# Altium PCB PCB1.PcbDoc (part 2 of 3)
Units mm, origin at the board's own origin, x right, y up, seen from the top; angles counter-clockwise.
Board outline 144.5 x 134 mm, 4 copper layers ([L1] Top, [L2] GND, [L3] POWER, [L4] BOTTOM), stack 1.584 mm thick; 275 components, 215 nets, 860 pads, 1046 vias.
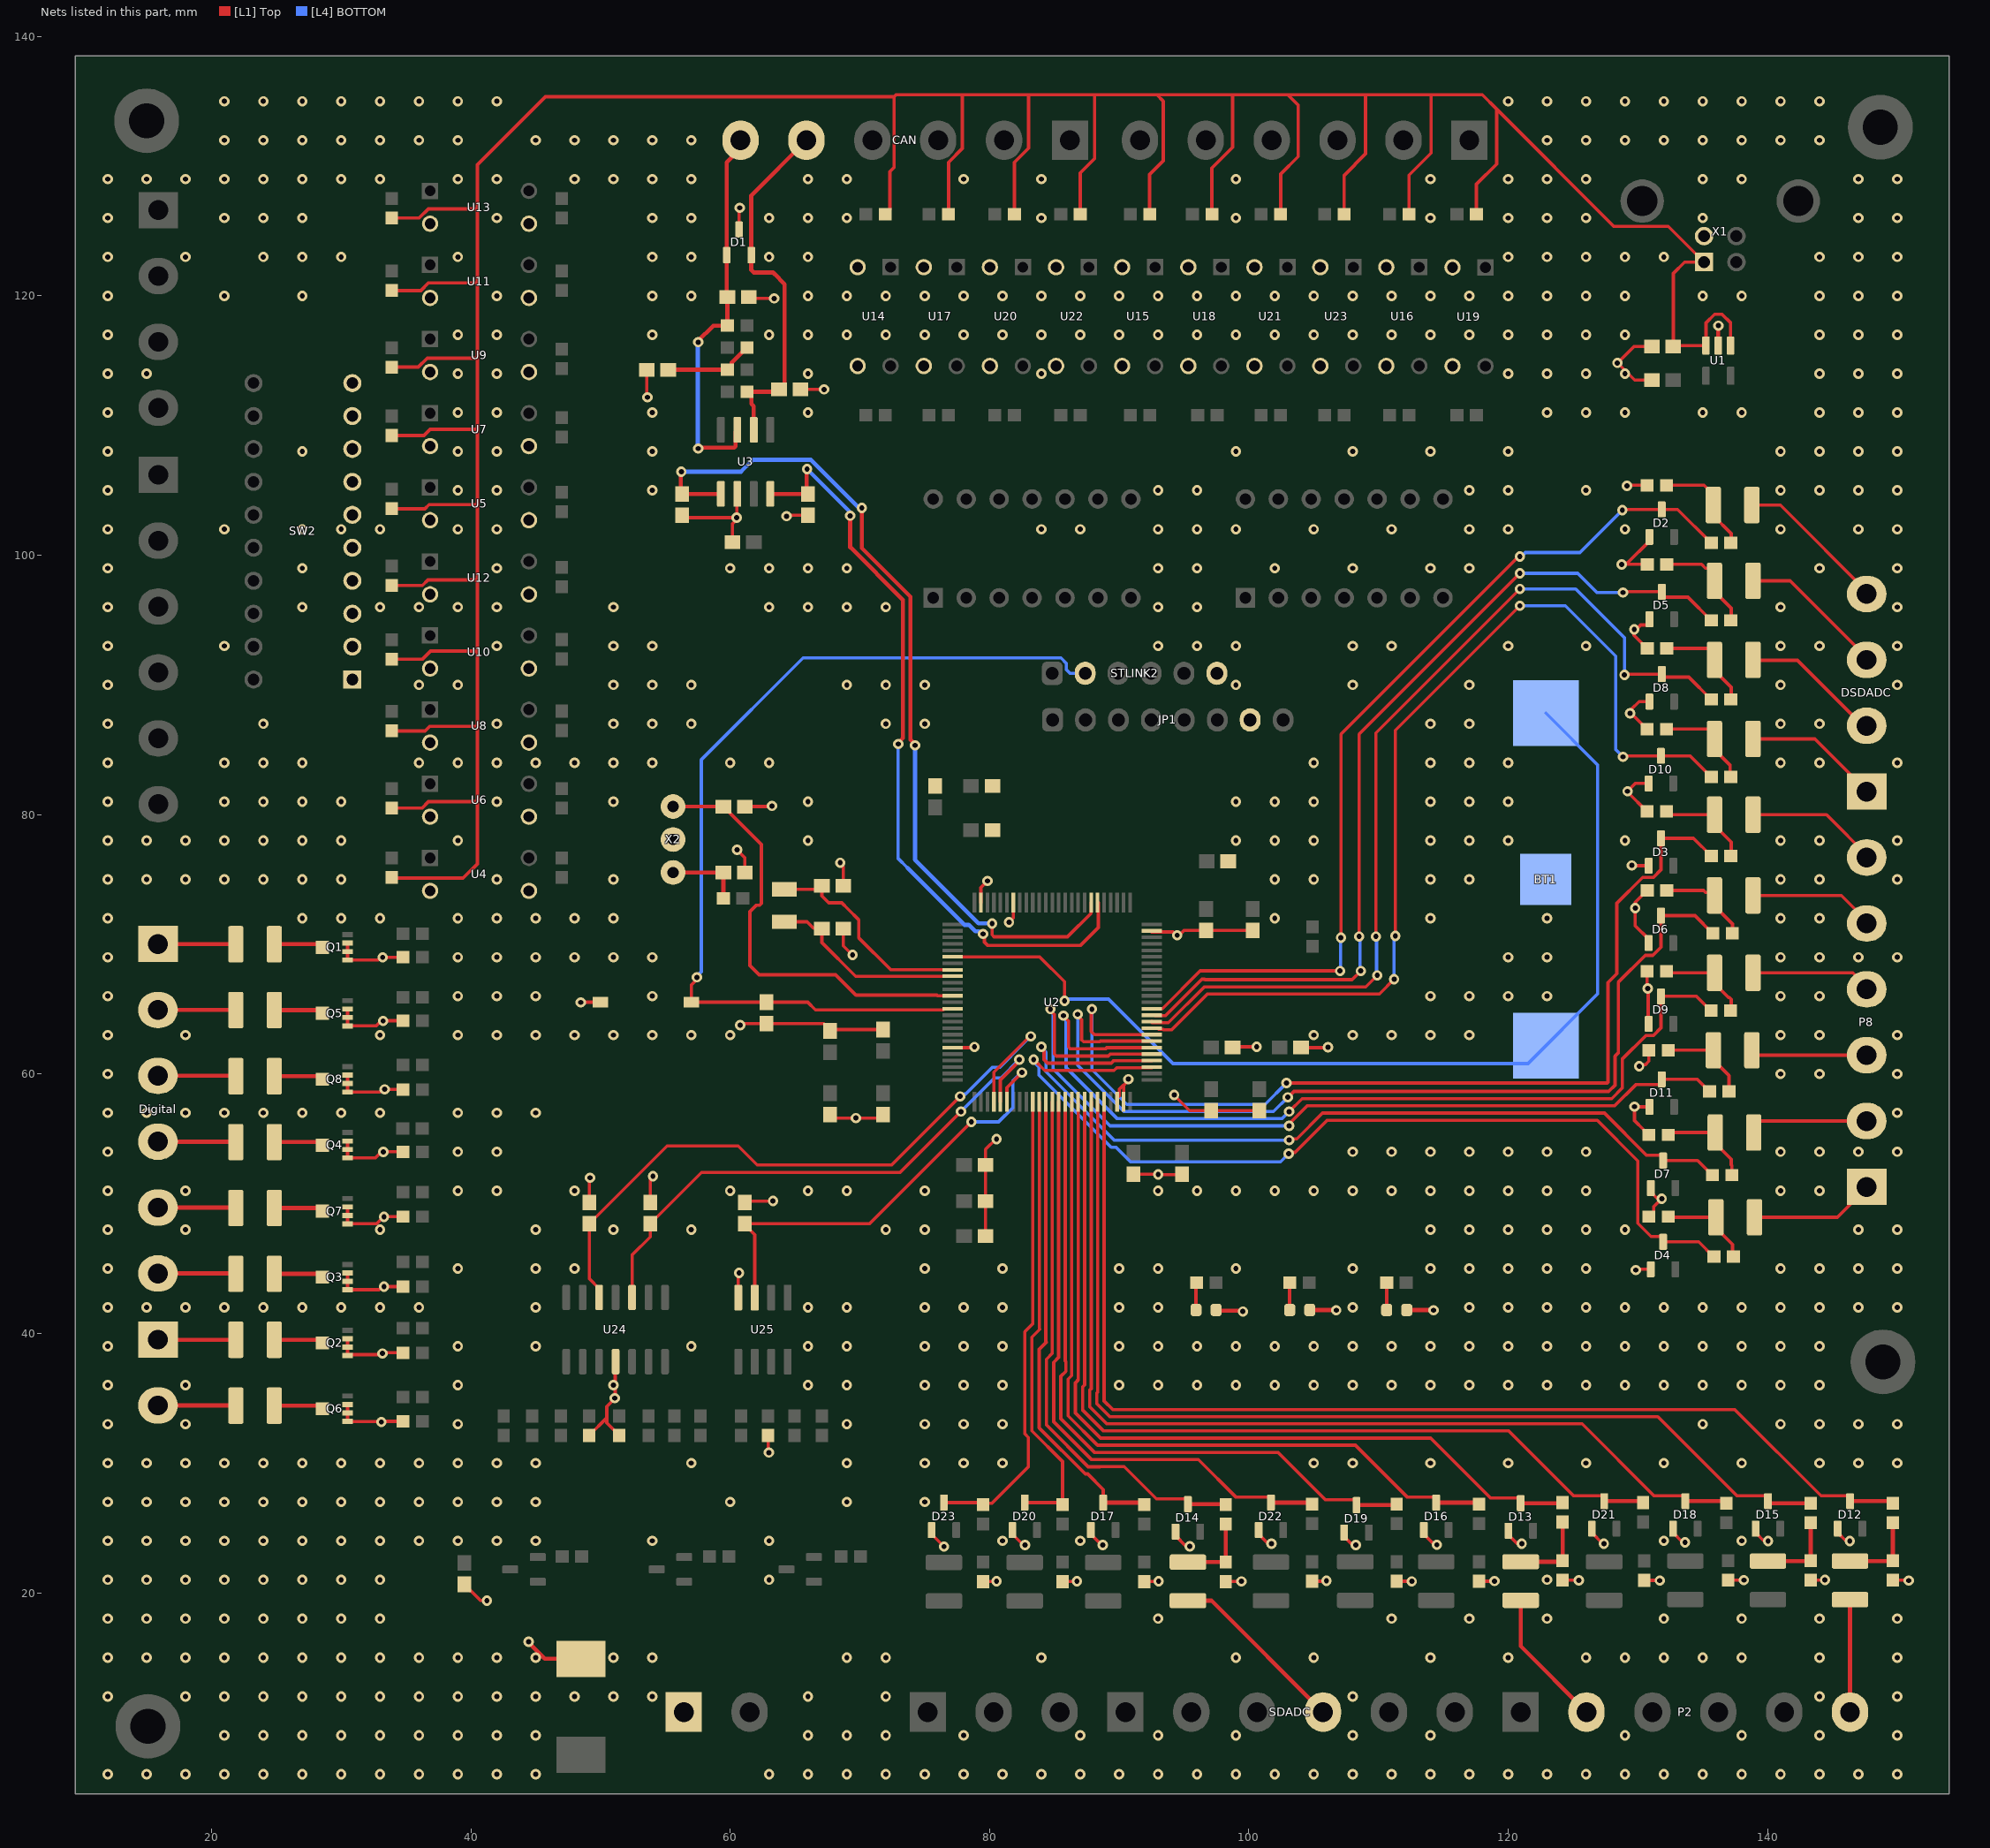
[diagram p4: the nets of this part, all layers, seen from the top]

## Via types
v1: diameter 0.8, hole 0.4, [L1] Top to [L4] BOTTOM, tented both sides, 816 vias
v2: diameter 0.8, hole 0.4, [L1] Top to [L4] BOTTOM, 223 vias
v3: diameter 1.27, hole 0.711, [L1] Top to [L4] BOTTOM, 5 vias
v4: diameter 0.8, hole 0.3, [L1] Top to [L4] BOTTOM, 2 vias

## Nets (pads, with @x,y where several pads share a name; then routed paths per layer and width w, separated by ;. In a path a pad name is that pad's centre, name@x,y a point inside that pad or via, vN(x,y) a via of type N, cw(c..) or ccw(c..) an arc to the next point about the centre after c; other vN are vias at no path point) (continued)
+5V: C11.2 R7.2 R9.2 R11.2 R13.2 R15.2 R17.2 R19.2 R21.2 R23.2 R25.2 R63.2 R65.2 R67.2 R69.2 R71.2 R73.2 R75.2 R77.2 R79.2 R81.2 U1.1 U1.3 X1.1 | length 337.8
  [L1] Top w0.26: R7.2@33.915,75.162 33.977,75.1 39.4,75.1 40.5,76.2 40.5,81 ; R11.2@33.915,80.503 36.239,80.503 36.736,81 40.5,81 ; R15.2@33.915,86.453 36.474,86.453 36.821,86.8 40.5,86.8 ; R19.2@33.915,91.986 36.292,91.986 36.906,92.6 40.5,92.6 ; R23.2@33.915,97.671 36.262,97.671 36.691,98.1 40.5,98.1 ; R9.2@33.915,103.583 36.459,103.583 36.776,103.9 40.5,103.9 ; R13.2@33.915,109.233 36.394,109.233 36.861,109.7 40.5,109.7 ; R17.2@33.915,114.5 35.946,114.5 36.646,115.2 40.5,115.2 ; R21.2@33.915,120.411 36.142,120.411 36.731,121 40.5,121 ; R25.2@33.915,126 36.016,126 36.716,126.7 40.5,126.7 ; R63.2@71.95,126.3 71.975,126.3 72.32,126.645 72.32,129.575 72.637,129.892 72.637,135.348 ; R69.2@76.835,126.3 76.835,130.296 77.9,131.361 77.9,135.5 ; R75.2@81.915,126.3 81.915,130.296 83,131.381 83,135.5 ; R79.2@86.995,126.3 86.995,129.478 88.1,130.583 88.1,135.5 ; R65.2@92.35,126.3 92.35,129.359 93.4,130.409 93.4,135 92.9,135.5 ; R71.2@97.15,126.3 97.15,129.85 98.75,131.45 98.75,135.5 ; R77.2@102.45,126.3 102.45,129.39 103.8,130.74 103.8,134.7 103,135.5 ; R81.2@107.35,126.3 107.35,129.3 109,130.95 109,135.5 ; R67.2@112.35,126.3 112.35,129.311 114.05,131.012 114.05,135.5 ; R73.2@117.55,126.3 117.55,128.613 119.1,130.163 119.1,134.4 ; U1.1@137.15,116.165 137.15,117.912 136.482,118.58 135.918,118.58 135.25,117.912 U1.3@135.25,116.165 132.791,116.165 C11.2@132.726,116.1 132.726,121.726 133.6,122.6 X1.1@135.1,122.6 132.343,125.357 128.143,125.357 119.1,134.4 ; 40.5,81 40.5,86.8 ; 40.5,86.8 40.5,92.6 ; 40.5,92.6 40.5,98.1 ; 40.5,98.1 40.5,103.9 ; 40.5,103.9 40.5,109.7 ; 40.5,109.7 40.5,115.2 ; 40.5,115.2 40.5,121 ; 40.5,121 40.5,126.7 ; 40.5,126.7 40.5,130.1 45.748,135.348 72.637,135.348 ; 72.637,135.348 72.789,135.5 77.9,135.5 ; 77.9,135.5 83,135.5 ; 83,135.5 88.1,135.5 ; 88.1,135.5 92.9,135.5 ; 92.9,135.5 98.75,135.5 ; 98.75,135.5 103,135.5 ; 103,135.5 109,135.5 ; 109,135.5 114.05,135.5 ; 114.05,135.5 118,135.5 119.1,134.4
GND: BT1.N C1.1 C2.1 C3.1 C4.1 C5.1 C6.1 C7.1 C8.1 C9.1 C10.1 C11.1 C12.2 C13.2 C14.1 C15.1 C16.1 C17.1 C18.1 C19.1 C20.1 C21.1 C22.1 C23.1 C24.2 C25.2 C26.2 C27.1 C28.1 C29.2 C30.1 C31.1 C32.1 C33.2 C34.2 C35.2 C36.2 D1.3 D2.1 D3.1 D4.1 D5.1 D6.1 D7.1 D8.1 D9.1 D10.1 D11.1 D12.1 D13.1 D14.1 D15.1 D16.1 D17.1 D18.1 D19.1 D20.1 D21.1 D22.1 D23.1 D24.A D25.1 D26.1 D27.1 JP1.7 PWR.1 Q1.1 Q1.2 Q1.3 Q2.1 Q2.2 Q2.3 Q3.1 Q3.2 Q3.3 Q4.1 Q4.2 Q4.3 Q5.1 Q5.2 Q5.3 Q6.1 Q6.2 Q6.3 Q7.1 Q7.2 Q7.3 Q8.1 Q8.2 Q8.3 R30.1 R31.1 R32.1 R36.1 R37.1 R38.1 R41.1 R42.1 R46.1 R47.1 R48.1 R52.1 R53.1 R54.1 R57.1 R58.1 R61.1 R62.1 R86.1 R87.1 R88.1 R92.1 R93.1 R94.1 R98.1 R99.1 R100.1 R104.1 R105.1 R106.1 R111.1 R112.1 R119.1 STLINK2.6 SW1.1 SW2.1 SW2.2 SW2.3 SW2.4 SW2.5 SW2.6 SW2.7 SW2.8 SW2.9 SW2.10 U1.2 U2.20 U2.48 U2.49 U2.74 U2.94 U2.99 U3.2 U4.2 U4.3 U5.2 U5.3 U6.2 U6.3 U7.2 U7.3 U8.2 U8.3 U9.2 U9.3 U10.2 U10.3 U11.2 U11.3 U12.2 U12.3 U13.2 U13.3 U14.2 U14.3 U15.2 U15.3 U16.2 U16.3 U17.2 U17.3 U18.2 U18.3 U19.2 U19.3 U20.2 U20.3 U21.2 U21.3 U22.2 U22.3 U23.2 U23.3 U24.11 U25.4 X1.4 X2.3 | length 237.2
  [L1] Top w0.25: Q6.3@30.489,34.519 Q6.2@30.489,33.869 Q6.1@30.489,33.219 30.516,33.192 33.071,33.192 v2(33.098,33.165) ; Q2.3@30.489,39.587 Q2.2@30.489,38.937 Q2.1@30.489,38.287 30.564,38.362 33.1,38.362 v2(33.187,38.448) ; Q3.3@30.489,44.667 Q3.2@30.489,44.017 Q3.1@30.489,43.367 32.925,43.367 33.156,43.599 v2(33.305,43.599) ; Q7.3@30.489,49.747 Q7.2@30.489,49.097 Q7.1@30.489,48.447 32.748,48.447 33.287,48.986 v2(33.305,48.986) ; Q4.3@30.489,54.827 Q4.2@30.489,54.177 Q4.1@30.489,53.527 32.636,53.527 33.097,53.988 v2(33.246,53.988) ; Q8.3@30.489,59.907 Q8.2@30.489,59.257 Q8.1@30.489,58.607 32.995,58.607 33.201,58.813 v2(33.35,58.813) ; Q5.3@30.489,65.007 Q5.2@30.489,64.357 Q5.1@30.489,63.707 32.714,63.707 33.09,64.083 v2(33.239,64.083) ; Q1.3@30.489,70.087 Q1.2@30.489,69.437 Q1.1@30.489,68.787 32.844,68.787 33.053,68.995 v2(33.202,68.995) ; v2@33.1,33.2 33.119,33.219 R38.1@34.76,33.219 ; v2@33.187,38.5 R31.1@34.76,38.5 ; v2@33.2,54 R36.1@34.76,54 ; v2@33.2,69 R30.1@34.76,69 ; v2@33.239,64.1 R37.1@34.76,64.1 ; v2@33.3,43.6 R32.1@34.76,43.6 ; v2@33.3,49 R41.1@34.76,49 ; v2@33.3,58.8 R42.1@34.76,58.8 ; C33.2@39.5,20.65 39.5,20.576 39.904,20.172 39.978,20.172 40.75,19.4 v2@41.2,19.4 ; v2@48.4,65.5 48.432,65.532 SW1.1@50,65.532 ; R119.1@49.135,32.119 49.135,32.144 50.48,33.489 ; C34.2@49.135,50.099 49.135,51.935 v2@49.2,52 ; U24.11@51.165,37.819 51.132,37.787 51.132,35.032 v2(51.1,35) 51.1,34.967 50.48,34.347 50.48,33.489 ; R111.1@51.435,32.119 51.435,32.144 50.48,33.099 50.48,33.489 ; C28.1@53.574,114.3 53.574,112.226 v2@53.6,112.2 ; C36.2@53.835,50.099 53.835,51.935 v2@54,52.1 ; C31.1@56.3,103.075 56.475,102.9 v2(60.5,102.9) ; C30.1@60.17,101 60.17,102.421 60.5,102.751 v2(60.5,102.9) ; v2@60.5,77.3 61.126,76.674 C24.2@61.126,75.538 ; U3.2@60.552,104.727 60.526,104.701 60.526,102.926 v2(60.5,102.9) ; v2@60.6,44.7 60.625,44.675 U25.4@60.625,42.759 ; D1.3@60.679,125.104 60.679,126.779 v2@60.7,126.8 ; v2@60.7,63.8 60.78,63.88 C25.2@62.8,63.88 67.22,63.88 67.7,63.4 C17.1@67.7,63.326 67.8,63.426 C16.1@71.8,63.426 ; C35.2@61.12,50.099 61.221,50.2 v2@63.3,50.2 ; C12.2@61.126,80.618 63.118,80.618 v2@63.2,80.7 ; C27.1@61.441,119.897 61.538,119.8 v2(63.4,119.8) ; v2@62.9,30.8 62.93,30.83 R112.1@62.93,32.119 ; v2@64.3,103 64.375,103.075 C29.2@66,103.075 ; C32.1@65.426,112.8 v2@67.2,112.8 ; C21.1@67.7,56.874 67.974,56.6 v2(69.7,56.6) 71.526,56.6 C20.1@71.8,56.874 ; v2@68.4,76.3 68.726,75.974 C13.2@68.726,74.5 ; C26.2@68.726,71.2 68.726,69.874 v2@69.4,69.2 ; D23.1@75.534,24.83 75.534,24.515 76.449,23.6 v2@76.5,23.6 ; U2.20@77.156,62.032 78.732,62.032 v2@78.8,62.1 ; U2.99@79.336,73.212 79.336,74.367 79.8,74.831 v2@79.8,74.9 ; R106.1@79.488,20.858 80.458,20.858 v2@80.5,20.9 ; C6.1@79.688,47.5 C4.1@79.688,50.2 C5.1@79.688,53 79.688,54.188 v2@80.5,55 ; v2(81.5,71.7) 81.836,72.036 U2.94@81.836,73.212 ; D20.1@81.765,24.83 81.765,24.515 82.58,23.7 v2@82.7,23.7 ; R100.1@85.636,20.858 86.458,20.858 v2@86.5,20.9 ; D17.1@87.815,24.83 87.815,24.515 88.63,23.7 v2@88.7,23.7 ; U2.48@89.836,57.852 89.836,58.136 90,58.3 90,58.8 90.326,59.126 90.356,59.126 ; U2.49@90.336,57.852 90.356,57.872 90.356,59.126 ; v2(90.7,59.6) 90.7,59.47 90.356,59.126 ; C18.1@91.1,52.274 v2@92.974,52.274 ; R94.1@91.94,20.858 92.958,20.858 v2@93,20.9 ; U2.74@92.516,71.032 92.516,70.947 94.153,70.947 v2@94.4,70.7 ; v2(93.003,52.245) 94.807,52.245 C19.1@94.836,52.274 ; v2@94.2,58.4 95.426,57.174 C22.1@97.1,57.174 C23.1@100.8,57.174 ; D14.1@94.346,24.71 94.346,24.395 95.141,23.6 v2@95.4,23.6 ; v2(94.472,70.694) 94.621,70.694 95.001,71.074 C9.1@96.7,71.074 C8.1@100.3,71.074 ; R88.1@98.217,20.858 99.358,20.858 v2@99.4,20.9 ; C14.1@98.752,62.032 98.82,62.1 v2(100.6,62.1) ; D22.1@100.75,24.83 100.75,24.515 101.465,23.8 v2@101.7,23.8 ; C15.1@104.026,62.032 106.032,62.032 v2@106.1,62.1 ; R105.1@104.875,20.885 105.885,20.885 v2@106,21 ; D19.1@107.35,24.64 107.35,24.325 107.975,23.7 v2@108.2,23.7 ; R99.1@111.398,20.885 112.485,20.885 v2@112.5,20.9 ; D16.1@113.496,24.83 113.496,24.515 114.206,23.805 114.395,23.805 v2(114.5,23.7) ; R93.1@117.736,20.885 118.885,20.885 v2@118.9,20.9 ; D13.1@120.01,24.779 120.01,24.464 120.674,23.8 v2@121,23.8 ; R87.1@124.2,20.973 125.373,20.973 v2@125.4,21 ; D21.1@126.45,24.94 126.45,24.625 127.275,23.8 v2@127.4,23.8 ; v2@128.4,114.8 129.7,116.1 C11.1@131.074,116.1 ; v2(128.419,114.827) 129.746,113.5 C10.1@131.074,113.5 ; v2@128.7,99.3 v2@128.705,99.295 ; v2(128.744,99.278) 128.849,99.384 129.182,99.384 130.893,101.095 D2.1@130.893,101.41 ; v2@129.1,105.4 129.109,105.391 R46.1@130.712,105.391 ; 129.182,99.295 R52.1@130.724,99.295 ; v2@129.5,76.1 129.546,76.054 D3.1@130.832,76.054 ; v2@129.7,94.3 129.7,93.817 130.699,92.818 R57.1@130.724,92.818 ; v2(129.721,94.277) 129.87,94.277 130.218,94.624 130.718,94.624 130.893,94.799 D5.1@130.893,95.06 ; v2@129.732,57.468 D11.1@130.893,57.468 ; v2(129.739,57.483) 129.739,56.411 130.475,55.675 130.475,55.65 130.825,55.3 R54.1@130.85,55.3 ; v2(129.795,72.796) 129.795,71.432 130.827,70.4 D6.1@130.827,70.085 ; v2@129.8,44.9 129.84,44.94 D4.1@130.993,44.94 ; v2@129.8,72.8 129.8,73.25 130.699,74.149 R53.1@130.724,74.149 ; v2(130.1,60.6) 130.205,60.705 130.564,60.705 130.839,60.98 R62.1@130.839,61.83 ; R104.1@130.5,20.95 131.65,20.95 v2@131.7,20.9 ; v2@130.712,66.612 R58.1@130.712,67.926 ; R47.1@130.712,80.245 130.687,80.245 129.2,81.732 v2(129.2,81.8) 129.804,82.404 D10.1@130.827,82.404 ; R61.1@130.712,86.595 130.687,86.595 129.482,87.8 v2(129.4,87.8) 129.505,87.905 129.505,88.125 130.09,88.71 D8.1@130.893,88.71 ; v2(130.751,66.595) 130.792,66.555 130.792,63.902 D9.1@130.832,63.862 ; R48.1@130.85,49 130.875,49 131.225,49.35 131.225,49.769 v2(131.839,50.383) ; D7.1@130.993,51.205 130.993,50.89 131.483,50.4 v2@131.8,50.4 ; D18.1@132.71,24.94 132.71,24.625 133.435,23.9 v2@133.6,23.9 ; R98.1@136.962,20.973 v2(138.173,20.973) ; D15.1@139.079,24.94 139.079,24.625 139.704,24 v2@140,24 ; R92.1@143.331,20.966 144.366,20.966 v2@144.4,21 ; D12.1@145.41,24.94 145.41,24.625 146.035,24 v2@146.3,24 ; R86.1@149.662,20.966 150.734,20.966 v2@150.8,20.9
  [L1] Top w0.32: v2@44.4,16.2 45.7,14.9 D24.A@48.5,14.9 ; D25.1@97.475,41.8 97.525,41.75 99.45,41.75 v2@99.5,41.7 ; D26.1@104.698,41.8 v2@106.7,41.8 ; D27.1@112.175,41.8 v2@114.2,41.8 ; U1.2@136.2,116.165 v2(136.2,117.7)
  other v1: 12,6 15,6 18,6 21,6 24,6 27,6 30,6 33,6 36,6 39,6 42,6 45,6 63,6 66,6 69,6 72,6 75,6 78,6 81,6 84,6 87,6 90,6 93,6 96,6 99,6 102,6 105,6 108,6 111,6 114,6 117,6 120,6 123,6 126,6 129,6 132,6 135,6 138,6 141,6 144,6 147,6 150,6 21,9 24,9 27,9 30,9 33,9 36,9 39,9 42,9 45,9 66,9 69,9 72,9 78,9 87,9 93,9 99,9 108,9 114,9 129,9 138,9 144,9 150,9 12,12 18,12 21,12 24,12 27,12 30,12 33,12 36,12 39,12 42,12 45,12 48,12 51,12 54,12 66,12 72,12 108,12 144,12 150,12 12,15 15,15 18,15 21,15 24,15 27,15 30,15 33,15 36,15 39,15 42,15 45,15 51,15 54,15 69,15 72,15 84,15 99,15 105,15 114,15 120,15 126,15 129,15 132,15 135,15 138,15 144,15 150,15 12,18 15,18 18,18 21,18 24,18 27,18 30,18 33,18 93,18 111,18 117,18 123,18 132,18 138,18 144,18 150,18 12,21 15,21 18,21 21,21 24,21 27,21 30,21 33,21 63,21 123,21 12,24 15,24 18,24 21,24 24,24 27,24 30,24 33,24 36,24 39,24 42,24 45,24 54,24 63,24 81,24 87,24 132,24 138,24 12,27 15,27 18,27 21,27 24,27 27,27 30,27 33,27 36,27 39,27 42,27 45,27 60,27 69,27 75,27 12,30 15,30 18,30 21,30 24,30 27,30 30,30 33,30 36,30 39,30 42,30 45,30 57,30 69,30 75,30 78,30 81,30 105,30 108,30 114,30 120,30 126,30 132,30 138,30 144,30 147,30 150,30 12,33 18,33 39,33 69,33 75,33 78,33 81,33 135,33 141,33 144,33 147,33 150,33 12,36 18,36 39,36 51,36 66,36 69,36 75,36 78,36 81,36 90,36 93,36 96,36 99,36 102,36 105,36 108,36 111,36 114,36 117,36 120,36 123,36 126,36 129,36 132,36 135,36 138,36 141,36 144,36 12,39 39,39 45,39 57,39 66,39 69,39 75,39 78,39 81,39 90,39 93,39 96,39 99,39 102,39 105,39 108,39 111,39 114,39 117,39 120,39 123,39 126,39 129,39 132,39 135,39 138,39 141,39 144,39 12,42 15,42 18,42 21,42 24,42 27,42 30,42 33,42 36,42 45,42 66,42 69,42 75,42 78,42 81,42 90,42 93,42 108,42 117,42 120,42 123,42 126,42 129,42 132,42 135,42 138,42 141,42 144,42 147,42 150,42 12,45 39,45 45,45 48,45 75,45 81,45 90,45 93,45 99,45 108,45 114,45 117,45 120,45 123,45 126,45 141,45 144,45 147,45 150,45 12,48 18,48 33,48 45,48 51,48 57,48 72,48 75,48 114,48 117,48 120,48 123,48 126,48 129,48 147,48 150,48 12,51 18,51 39,51 42,51 48,51 60,51 66,51 69,51 75,51 93,51 96,51 99,51 102,51 105,51 108,51 111,51 114,51 117,51 120,51 123,51 126,51 141,51 144,51 12,54 39,54 42,54 108,54 111,54 114,54 117,54 120,54 123,54 126,54 141,54 144,54 147,54 150,54 12,57 15,57 18,57 21,57 24,57 27,57 30,57 33,57 39,57 42,57 45,57 150,57 12,60 141,60 144,60 150,60 12,63 18,63 33,63 39,63 42,63 45,63 48,63 51,63 54,63 57,63 60,63 105,63 108,63 111,63 114,63 117,63 141,63 144,63 150,63 12,66 39,66 42,66 45,66 54,66 114,66 117,66 120,66 123,66 141,66 144,66 12,69 39,69 42,69 45,69 48,69 51,69 54,69 120,69 123,69 141,69 144,69 147,69 150,69 12,72 27,72 30,72 33,72 39,72 42,72 45,72 48,72 51,72 102,72 114,72 123,72 141,72 144,72 12,75 15,75 18,75 21,75 24,75 27,75 30,75 42,75 51,75 102,75 105,75 114,75 117,75 141,75 144,75 150,75 12,78 15,78 18,78 21,78 24,78 27,78 30,78 39,78 66,78 99,78 102,78 105,78 114,78 117,78 120,78 129,78 141,78 144,78 150,78 12,81 21,81 24,81 27,81 30,81 42,81 51,81 66,81 99,81 102,81 105,81 114,81 117,81 120,81 12,84 21,84 24,84 27,84 36,84 39,84 42,84 45,84 48,84 51,84 54,84 60,84 63,84 105,84 114,84 117,84 120,84 141,84 144,84 150,84 12,87 24,87 42,87 51,87 54,87 57,87 72,87 75,87 114,87 117,87 141,87 144,87 12,90 36,90 39,90 51,90 54,90 57,90 69,90 72,90 75,90 99,90 108,90 117,90 141,90 150,90 12,93 21,93 42,93 51,93 54,93 93,93 96,93 99,93 108,93 111,93 120,93 126,93 141,93 144,93 150,93 12,96 27,96 33,96 36,96 39,96 42,96 51,96 63,96 66,96 69,96 72,96 93,96 96,96 141,96 150,96 12,99 27,99 42,99 60,99 63,99 66,99 69,99 93,99 96,99 102,99 108,99 114,99 117,99 144,99 150,99 12,102 21,102 27,102 30,102 33,102 39,102 42,102 84,102 87,102 93,102 96,102 99,102 105,102 111,102 117,102 120,102 129,102 141,102 147,102 150,102 12,105 39,105 42,105 54,105 93,105 96,105 117,105 120,105 126,105 141,105 144,105 147,105 150,105 12,108 27,108 39,108 42,108 54,108 99,108 108,108 114,108 120,108 141,108 144,108 147,108 150,108 12,111 39,111 42,111 54,111 66,111 123,111 126,111 129,111 135,111 138,111 144,111 147,111 150,111 12,114 15,114 39,114 42,114 66,114 84,114 120,114 123,114 126,114 129,114 144,114 147,114 150,114 12,117 39,117 42,117 54,117 63,117 66,117 69,117 72,117 75,117 78,117 81,117 84,117 87,117 90,117 93,117 96,117 99,117 102,117 105,117 108,117 111,117 114,117 117,117 120,117 123,117 126,117 129,117 144,117 147,117 150,117 12,120 21,120 27,120 42,120 54,120 57,120 66,120 69,120 72,120 75,120 78,120 81,120 84,120 87,120 90,120 93,120 96,120 99,120 102,120 105,120 108,120 111,120 114,120 117,120 120,120 123,120 126,120 129,120 135,120 138,120 144,120 147,120 150,120 12,123 18,123 24,123 27,123 30,123 39,123 54,123 57,123 63,123 66,123 120,123 123,123 126,123 129,123 132,123 144,123 147,123 150,123 12,126 21,126 24,126 27,126 42,126 54,126 57,126 63,126 66,126 69,126 84,126 99,126 114,126 120,126 123,126 126,126 135,126 147,126 150,126 12,129 15,129 18,129 21,129 24,129 27,129 30,129 33,129 39,129 42,129 48,129 51,129 54,129 57,129 66,129 69,129 78,129 84,129 99,129 114,129 120,129 123,129 126,129 135,129 138,129 147,129 150,129 21,132 24,132 27,132 30,132 33,132 36,132 39,132 45,132 48,132 51,132 54,132 57,132 123,132 126,132 129,132 132,132 135,132 138,132 141,132 144,132 21,135 24,135 27,135 30,135 33,135 36,135 39,135 42,135 120,135 123,135 126,135 129,135 132,135 135,135 138,135 141,135 144,135
  other v2: 44.463,16.227 41.239,19.383 80.539,20.883 86.739,20.883 93.039,20.883 99.423,20.875 112.559,20.875 118.94,20.896 105.982,20.926 131.689,20.933 150.882,20.933 125.438,20.96 144.424,20.982 76.492,23.559 95.439,23.583 82.739,23.683 88.739,23.683 108.239,23.683 101.739,23.783 121.039,23.783 127.377,23.783 133.639,23.883 140.039,23.983 146.339,23.983 62.98,30.809 99.539,41.683 106.739,41.783 114.239,41.783 60.687,44.659 129.839,44.883 63.302,50.214 49.192,51.994 54.048,52.12 80.539,54.983 94.239,58.383 106.109,62.057 78.839,62.083 60.77,63.757 48.471,65.515 69.439,69.183 79.839,74.883 129.539,76.083 68.488,76.285 60.539,77.283 63.223,80.666 64.34,103.009 129.153,105.351 53.622,112.179 67.239,112.783 60.739,126.783
NetBT1_P1: BT1.P1 BT1.P2 U2.6 | length 79.8
  [L1] Top w0.25: U2.6@77.156,69.032 83.868,69.032 85.783,67.117 v2(85.783,65.634)
  [L4] BOTTOM w0.25: v2@85.7,65.6 85.875,65.775 89.17,65.775 94.145,60.8 121.525,60.8 126.9,66.175 126.9,83.825 BT1.P1@122.9,87.825
NetC12_1: C12.1 U2.12 X2.1 | length 34.5
  [L1] Top w0.25: X2.1@55.6,80.618 C12.1@59.474,80.618 59.548,80.618 59.952,80.214 59.952,80.14 62.4,77.692 62.4,73.146 62.254,73 62,73 61.524,72.524 61.524,68.354 62.228,67.65 68.132,67.65 69.7,66.082 75.933,66.082 75.983,66.032 U2.12@77.156,66.032
NetC13_1: C13.1 U2.8 Y1.2 | length 17
  [L1] Top w0.25: Y1.2@64.167,74.232 C13.1@67.142,74.232 ; C13.1@67.074,74.5 67.074,73.726 67.6,73.2 68.6,73.2 69.1,72.7 69.904,71.896 69.904,70.515 72.387,68.032 U2.8@77.156,68.032
NetC24_1: C24.1 R2.2 X2.2 | length 5.9
  [L1] Top w0.32: X2.2@55.6,75.538 C24.1@59.474,75.538 R2.2@59.474,73.538
NetC25_1: C25.1 STLINK2.2 SW1.2 U2.14 | length 73.1
  [L1] Top w0.25: v2(57.436,67.452) 57.436,67.303 57,66.867 SW1.2@57,65.532 C25.1@62.8,65.532 65.979,65.532 66.579,64.932 76.262,64.932 76.262,64.947 76.431,64.947 76.516,65.032 U2.14@77.156,65.032
  [L4] BOTTOM w0.25: v2@57.4,67.5 57.78,67.88 57.78,84.226 65.628,92.075 85.516,92.075 85.911,91.68 85.911,91.19 86.201,90.9 STLINK2.2@87.376,90.9
NetC26_1: C26.1 U2.9 Y1.1 | length 15.3
  [L1] Top w0.25: Y1.1@64.167,71.732 65.932,71.732 66.432,71.232 C26.1@67.074,71.232 ; C26.1@67.074,71.2 67.074,70.126 69.668,67.532 U2.9@77.156,67.532
NetC27_2: C27.2 CAN.6 D1.1 R3.2 U3.7 | length 30
  [L1] Top w0.32: v2@57.5,108.3 60.313,108.3 60.412,108.399 60.412,109.527 U3.7@60.552,109.667 ; v2@57.5,116.5 58.7,117.7 R3.2@59.789,117.7 C27.2@59.789,119.897 59.729,119.957 D1.1@59.729,123.144 59.729,130.29 60.8,131.361 CAN.6@60.8,132
  [L4] BOTTOM w0.32: v2@57.5,108.3 v2@57.5,116.5
  other v2: 57.527,108.225 57.527,116.425
NetC28_2: C28.2 R4.1 R5.2 | length 7.6
  [L1] Top w0.32: C28.2@55.226,114.3 R5.2@60.089,114.3 ; C28.2@55.226,114.6 C28.2@55.526,114.3 ; R5.2@59.814,114.3 60.129,114.615 60.129,114.865 61.264,116 R4.1@61.289,116
NetC29_1: C29.1 U2.81 U3.4 | length 59
  [L1] Top w0.25: v2(79.5,70.8) 79.605,70.695 79.605,70.168 79.873,69.9 87,69.9 88.386,71.286 88.386,73.212 U2.81@88.336,73.212
  [L1] Top w0.32: U3.4@63.092,104.727 C29.1@66,104.727 ; v2@65.9,106.7 65.9,104.827 C29.1@66,104.727 ; v2(69.255,103.043) 69.255,100.617 73.315,96.558 73.315,85.9 72.915,85.5 v2@72.9,85.5
  [L4] BOTTOM w0.25: v2(72.955,85.443) 72.955,76.601 73.654,75.902
  [L4] BOTTOM w0.32: v2(65.932,106.641) v2@69.337,103.237 ; 73.654,75.902 78.056,71.5 78.398,71.5 78.903,70.995 79.175,70.995 79.37,70.8 v2(79.5,70.8)
NetC31_2: C31.2 U2.82 U3.1 | length 67.3
  [L1] Top w0.25: v2(80.2,71.6) 80.2,70.721 80.346,70.575 86.008,70.575 87.821,72.388 87.821,72.557 87.836,72.572 U2.82@87.836,73.212
  [L1] Top w0.32: v2@56.2,106.5 56.2,104.827 C31.2@56.3,104.727 U3.1@59.282,104.727 ; v2(70.155,103.643) 70.155,100.545 73.9,96.8 73.9,85.771 74.2,85.471 v2@74.2,85.4
  [L4] BOTTOM w0.32: v2(56.232,106.441) 60.839,106.441 61.749,107.351 66.226,107.351 v2@69.939,103.639 ; v2(74.255,85.343) 74.255,76.52 79.16,71.615 80.185,71.615 v2(80.2,71.6)
NetC32_2: C32.2 CAN.5 D1.2 R6.1 U3.6 | length 28.8
  [L1] Top w0.32: U3.6@61.822,109.667 61.8,109.689 61.8,111.5 61.629,111.671 61.629,112.285 61.314,112.6 R6.1@61.289,112.6 63.574,112.6 C32.2@63.774,112.8 63.831,112.8 64.2,113.169 64.2,120.9 63.4,121.7 63.3,121.8 61.816,121.8 61.629,121.987 D1.2@61.629,123.144 61.629,127.749 CAN.5@65.88,132
NetC34_1: C34.1 U2.29 U24.5 | length 53.6
  [L1] Top w0.25: U24.5@49.895,42.769 49.895,43.454 49.135,44.214 C34.1@49.135,48.447 49.135,48.521 49.504,48.89 49.578,48.89 55.138,54.45 60.616,54.45 62.076,52.99 72.452,52.99 v2(77.731,58.269) ; U2.29@80.336,57.852 80.336,60.136 83.1,62.9 v2(83.175,62.9)
  [L4] BOTTOM w0.25: v2(77.731,58.269) 77.88,58.269 78.058,58.448 78.148,58.448 80.212,60.511 80.811,60.511 81.625,61.325 81.625,61.38 83.145,62.9 v2(83.175,62.9)
NetC35_1: C35.1 U2.31 U25.3 | length 36.1
  [L1] Top w0.25: C35.1@61.12,48.373 61.895,47.598 U25.3@61.895,42.759 ; C35.1@61.12,48.447 70.747,48.447 v2(78.6,56.3) ; U2.31@81.336,57.852 81.336,58.936 82.5,60.1 v2(82.5,60.109)
  [L4] BOTTOM w0.25: v2(78.6,56.3) 80.7,56.3 81.8,57.4 81.8,59.471 82.438,60.109 v2(82.5,60.109)
NetC36_1: C36.1 U2.30 U24.3 | length 43.9
  [L1] Top w0.25: U24.3@52.435,42.769 52.435,46.035 53.835,47.435 C36.1@53.835,48.447 53.835,48.521 54.204,48.89 54.278,48.89 57.793,52.405 73.105,52.405 v2(77.8,57.1) ; U2.30@80.836,57.852 80.836,59.536 82.3,61 v2(82.3,61.1)
  [L4] BOTTOM w0.25: v2(77.8,57.1) 80.395,59.695 80.895,59.695 v2(82.3,61.1)
NetD2_3: D2.3 R43.2 U2.62 | length 70.8
  [L1] Top w0.25: U2.62@92.516,65.032 92.531,65.047 93.34,65.047 96.25,67.957 107.016,67.957 v2(107.032,67.941) ; v2(107.1,70.5) 107.1,86.2 120.8,99.9 v2(120.9,99.9) ; v2@128.77,103.53 D2.3@131.843,103.53 133.056,103.53 135.64,100.946 R43.2@135.665,100.946
  [L4] BOTTOM w0.25: v2(107.032,67.941) 107.066,67.975 107.066,70.466 v2(107.1,70.5) ; v2(120.9,99.9) 121.021,99.9 121.321,100.2 125.531,100.2 v2(128.802,103.471)
NetD3_3: D3.3 R44.2 U2.58 | length 78.2
  [L1] Top w0.25: v2(87.9,65) 87.85,64.95 87.85,63.274 88.092,63.032 U2.58@92.516,63.032 ; v2(102.9,59.3) 127.625,59.3 127.69,59.366 127.69,67.046 128.372,67.728 128.372,73.161 130.375,75.164 131.202,75.164 131.782,75.744 D3.3@131.782,78.174 134.282,78.174 135.64,76.816 R44.2@135.665,76.816
  [L4] BOTTOM w0.25: v2(87.9,65) 87.9,60.345 90.595,57.65 101.25,57.65 v2(102.9,59.3)
NetD4_3: D4.3 R45.2 U2.53 | length 74.4
  [L1] Top w0.25: v2(83.4,61.1) 83.422,61.1 84.247,60.275 89.608,60.275 89.815,60.482 92.516,60.482 U2.53@92.516,60.532 ; v2(103.068,53.855) 103.173,53.96 103.56,53.96 106.032,56.432 126.868,56.432 130,53.3 130,48.486 131.011,47.475 131.768,47.475 131.943,47.3 D4.3@131.943,47.06 134.685,47.06 135.84,45.905 R45.2@135.865,45.905
  [L4] BOTTOM w0.25: v2(83.4,61.1) 83.4,60.951 83.8,60.551 83.8,59.937 89.387,54.35 89.75,54.35 90.875,53.225 102.438,53.225 v2(103.068,53.855)
NetD5_3: D5.3 R49.2 U2.61 | length 69.6
  [L1] Top w0.25: U2.61@92.759,64.497 93.568,64.497 96.374,67.304 96.581,67.304 96.619,67.266 107.957,67.266 v2(108.632,67.941) ; v2(108.5,70.6) 108.5,86.2 v2(120.9,98.6) ; v2@128.82,97.18 D5.3@131.843,97.18 131.843,96.94 132.018,96.765 133.852,96.765 135.64,94.977 R49.2@135.665,94.977
  [L4] BOTTOM w0.25: v2(108.5,70.6) 108.566,70.534 108.566,68.034 v2@108.6,68 ; v2(120.9,98.6) 125.368,98.6 126.846,97.121 v2(128.852,97.121)
NetD6_3: D6.3 R50.2 U2.57 | length 74.7
  [L1] Top w0.25: v2(86.8,64.6) 86.8,64.479 87.1,64.179 87.1,62.628 87.246,62.482 88.5,62.482 88.55,62.532 U2.57@92.516,62.532 ; v2(103,58.2) 103.021,58.2 103.471,58.65 127.752,58.65 128.24,59.138 128.24,61.373 128.484,61.616 128.484,67.062 130.567,69.145 131.147,69.145 131.777,69.775 D6.3@131.777,72.205 134.397,72.205 135.755,70.847 R50.2@135.78,70.847
  [L4] BOTTOM w0.25: v2(86.8,64.6) 86.8,60.668 90.368,57.1 101.9,57.1 v2(103,58.2)
NetD7_3: D7.3 R51.2 U2.54 | length 68.2
  [L1] Top w0.25: v2(84,62.1) 84,61.951 84.2,61.751 84.2,61.1 84.468,60.832 89.388,60.832 89.588,61.032 U2.54@92.516,61.032 ; v2(103.1,54.9) 103.198,54.998 103.698,54.998 105.682,56.982 127.418,56.982 130.66,53.74 131.768,53.74 131.943,53.565 D7.3@131.943,53.325 134.6,53.325 135.725,52.2 R51.2@135.75,52.2
  [L4] BOTTOM w0.25: v2(84,62.1) 84,62.029 84.35,61.679 84.35,60.164 89.614,54.9 v2(103.1,54.9)
NetD8_3: D8.3 R55.2 U2.60 | length 73.5
  [L1] Top w0.25: U2.60@92.516,64.032 92.496,64.032 92.481,64.017 92.551,63.947 93.796,63.947 96.565,66.716 109.016,66.716 v2(109.9,67.6) ; v2(109.8,70.6) 109.8,86.3 v2(120.9,97.4) ; v2@128.9,90.8 128.93,90.83 D8.3@131.843,90.83 ; D8.3@131.843,90.775 132.018,90.6 133.921,90.6 135.64,88.881 R55.2@135.665,88.881
  [L4] BOTTOM w0.25: v2(109.8,70.6) 109.85,70.55 109.85,67.65 v2(109.9,67.6) ; v2(120.9,97.4) 125.2,97.4 128.962,93.638 v2(128.962,90.771)
NetD9_3: D9.3 R56.2 U2.56 | length 71.7
  [L1] Top w0.25: v2(85.7,64.5) 85.7,64.479 86.1,64.079 86.1,62.078 86.246,61.932 88.932,61.932 89.032,62.032 U2.56@92.516,62.032 ; v2(103.1,57.1) 104.1,58.1 127.98,58.1 128.79,58.91 128.79,61.145 130.617,62.972 131.202,62.972 131.782,63.552 D9.3@131.782,65.982 131.8,66 134.506,66 135.628,64.878 R56.2@135.653,64.878
  [L4] BOTTOM w0.25: v2(85.7,64.5) 85.7,64.351 85.9,64.151 85.9,60.5 89.85,56.55 102.55,56.55 v2(103.1,57.1)
NetD10_3: D10.3 R59.2 U2.59 | length 77.8
  [L1] Top w0.25: U2.59@92.516,63.532 92.548,63.5 93,63.5 93.053,63.447 93.41,63.447 93.46,63.397 94.031,63.397 96.8,66.166 110.066,66.166 v2(111.2,67.3) ; v2(111.295,70.646) 111.295,86.495 v2(120.9,96.1) ; v2@128.8,84.5 128.824,84.524 D10.3@131.777,84.524 134.028,84.524 135.64,82.912 R59.2@135.665,82.912
  [L4] BOTTOM w0.25: v2(111.2,67.3) 111.2,70.6 v2@111.3,70.7 ; v2(120.9,96.1) 124.4,96.1 128.287,92.213 128.287,85.01 v2(128.844,84.453)
NetD11_3: D11.3 R60.2 U2.55 | length 70.5
  [L1] Top w0.25: v2(84.7,65) 84.7,64.879 85,64.579 85,61.528 85.146,61.382 89.16,61.382 89.31,61.532 U2.55@92.516,61.532 ; v2(103.1,56) 103.1,56.145 104.505,57.55 128.208,57.55 129.831,59.173 131.668,59.173 131.843,59.348 D11.3@131.843,59.588 134.568,59.588 135.501,58.655 R60.2@135.526,58.655
  [L4] BOTTOM w0.25: v2(84.7,65) 84.7,64.851 84.9,64.651 84.9,60.392 89.292,56 v2(103.1,56)
NetD12_3: D12.3 R83.2 U2.46 | length 87.3
  [L1] Top w0.25: 89.5,34.122 137.472,34.122 144.119,27.475 146.185,27.475 146.36,27.3 D12.3@146.36,27.06
  [L1] Top w0.26: U2.46@88.836,57.852 88.836,34.791 89.5,34.127
  [L1] Top w0.32: D12.3@146.36,27.06 149.501,27.06 R83.2@149.662,26.899
NetD13_3: D13.3 R84.2 U2.42 | length 64.7
  [L1] Top w0.25: 88.56,31.922 114.02,31.922 118.628,27.314 120.785,27.314 120.96,27.139 D13.3@120.96,26.899
  [L1] Top w0.26: 86.781,36.403 86.781,36.348 86.616,36.183 86.616,33.871 88.56,31.927 ; 86.836,36.403 U2.42@86.836,57.852
  [L1] Top w0.32: D13.3@120.96,26.899 124.149,26.899 R84.2@124.2,26.95
NetD14_3: D14.3 R85.2 U2.38 | length 41.6
  [L1] Top w0.25: 88.5,29.722 90.385,29.722 92.862,27.245 95.121,27.245 95.296,27.07 D14.3@95.296,26.83
  [L1] Top w0.26: U2.38@84.836,57.852 84.836,38.448 84.386,37.998 84.386,32.948 87.617,29.717 88.5,29.717
  [L1] Top w0.32: D14.3@95.296,26.83 98.19,26.83 R85.2@98.217,26.803
NetD15_3: D15.3 R89.2 U2.45 | length 81.7
  [L1] Top w0.25: U2.45@88.336,57.852 88.336,35.455 88.281,35.4 88.281,34.561 89.27,33.572 90,33.572 131.534,33.572 137.63,27.475 139.854,27.475 140.029,27.3 D15.3@140.029,27.06 D15.3@140.029,27.039
  [L1] Top w0.32: D15.3@140.029,27.039 140.169,26.899 R89.2@143.331,26.899
NetD16_3: D16.3 R90.2 U2.41 | length 59
  [L1] Top w0.25: U2.41@86.336,57.852 86.336,36.743 86.061,36.468 86.061,33.641 88.331,31.372 88.7,31.372 108.22,31.372 112.227,27.365 114.271,27.365 114.446,27.19 D16.3@114.446,26.95
  [L1] Top w0.32: D16.3@114.446,26.95 117.628,26.95 R90.2@117.748,26.83
NetD17_3: D17.3 R91.2 U2.37 | length 36.5
  [L1] Top w0.26: U2.37@84.336,57.852 84.336,39.364 84.38,39.32 83.826,38.765 83.826,32.716 87.385,29.157 87.563,29.157 88.765,27.955 D17.3@88.765,26.95
  [L1] Top w0.32: D17.3@88.765,26.95 91.793,26.95 R91.2@91.94,26.803
NetD18_3: D18.3 R95.2 U2.44 | length 75.9
  [L1] Top w0.25: 89.03,33.022 125.692,33.022 131.239,27.475 133.485,27.475 133.66,27.3 D18.3@133.66,27.06
  [L1] Top w0.26: U2.44@87.836,57.852 87.836,35.74 87.726,35.63 87.726,34.331 89.03,33.027
  [L1] Top w0.32: D18.3@133.66,27.06 136.681,27.06 R95.2@136.835,26.906
NetD19_3: D19.3 R96.2 U2.40 | length 53.4
  [L1] Top w0.25: 88.091,30.822 102.247,30.822 105.894,27.175 108.125,27.175 108.3,27 D19.3@108.3,26.76
  [L1] Top w0.26: U2.40@85.836,57.852 85.836,37.864 85.883,37.817 85.883,37.075 85.506,36.698 85.506,33.411 88.091,30.827
  [L1] Top w0.32: D19.3@108.3,26.76 111.328,26.76 R96.2@111.398,26.83
NetD20_3: D20.3 R97.2 U2.36 | length 35.3
  [L1] Top w0.25: D20.3@82.715,26.95 85.489,26.95 R97.2@85.636,26.803 85.636,30.121 83.271,32.486 83.271,39.697 83.887,40.313 83.836,40.364 U2.36@83.836,57.852
NetD21_3: D21.3 R101.2 U2.43 | length 70.2
  [L1] Top w0.25: U2.43@87.336,57.852 87.336,36.025 87.171,35.86 87.171,34.101 88.8,32.472 120.042,32.472 125.039,27.475 127.225,27.475 127.4,27.3 D21.3@127.4,27.06
  [L1] Top w0.32: D21.3@127.4,27.06 130.29,27.06 R101.2@130.4,26.95
NetD22_3: D22.3 R102.2 U2.39 | length 47.5
  [L1] Top w0.25: 87.849,30.272 96.112,30.272 99.019,27.365 101.525,27.365 101.7,27.19 D22.3@101.7,26.95
  [L1] Top w0.26: U2.39@85.336,57.852 85.336,38.156 84.946,37.766 84.946,33.179 87.849,30.277
  [L1] Top w0.32: D22.3@101.7,26.95 104.755,26.95 R102.2@104.875,26.83
NetD23_3: D23.3 R103.2 U2.35 | length 36.6
  [L1] Top w0.25: D23.3@76.484,27.265 D23.3@76.484,26.95 79.341,26.95 R103.2@79.488,26.803 79.577,26.892 80.192,26.892 83,29.7 83,31.979 82.721,32.258 82.721,40.121 83.339,40.739 83.339,41.261 83.336,41.264 U2.35@83.336,57.852
NetD25_2: D25.2 R122.2 | length 2.1
  [L1] Top w0.26: D25.2@95.925,41.8 95.925,43.85 R122.2@95.975,43.9
NetD26_2: D26.2 R123.2 | length 2.1
  [L1] Top w0.26: D26.2@103.148,41.8 R123.2@103.148,43.9
NetD27_2: D27.2 R124.2 | length 2.1
  [L1] Top w0.26: D27.2@110.625,41.8 R124.2@110.625,43.9
NetF1_1: Digital.1 F1.1 | length 6
  [L1] Top w0.32: Digital.1@15.876,70.018 15.888,70.006 F1.1@21.873,70.006
NetF1_2: F1.2 Q1.5 | length 3.8
  [L1] Top w0.32: F1.2@24.843,70.006 28.305,70.006 Q1.5@28.549,69.762
NetF2_1: F2.1 P9.1 | length 6
  [L1] Top w0.32: P9.1@15.876,39.518 15.888,39.506 F2.1@21.873,39.506
NetF2_2: F2.2 Q2.5 | length 3.8
  [L1] Top w0.32: F2.2@24.843,39.506 28.305,39.506 Q2.5@28.549,39.262
NetF3_1: Digital.6 F3.1 | length 6
  [L1] Top w0.32: Digital.6@15.876,44.618 21.841,44.618 F3.1@21.873,44.586
NetF3_2: F3.2 Q3.5 | length 3.8
  [L1] Top w0.32: F3.2@24.843,44.586 28.305,44.586 Q3.5@28.549,44.342
NetF4_1: Digital.4 F4.1 | length 6
  [L1] Top w0.32: Digital.4@15.876,54.778 21.841,54.778 F4.1@21.873,54.746
NetF4_2: F4.2 Q4.5 | length 3.8
  [L1] Top w0.32: F4.2@24.843,54.746 28.305,54.746 Q4.5@28.549,54.502
NetF5_1: Digital.2 F5.1 | length 6
  [L1] Top w0.32: Digital.2@15.876,64.938 21.861,64.938 F5.1@21.873,64.926
NetF5_2: F5.2 Q5.5 | length 3.8
  [L1] Top w0.32: F5.2@24.843,64.926 28.305,64.926 Q5.5@28.549,64.682
NetF6_1: F6.1 P9.2 | length 6
  [L1] Top w0.32: P9.2@15.876,34.438 21.861,34.438 F6.1@21.873,34.426
NetF6_2: F6.2 Q6.5 | length 3.8
  [L1] Top w0.32: F6.2@24.843,34.426 28.317,34.426 Q6.5@28.549,34.194
NetF7_1: Digital.5 F7.1 | length 6
  [L1] Top w0.32: Digital.5@15.876,49.698 21.841,49.698 F7.1@21.873,49.666
NetF7_2: F7.2 Q7.5 | length 3.8
  [L1] Top w0.32: F7.2@24.843,49.666 28.305,49.666 Q7.5@28.549,49.422
NetF8_1: Digital.3 F8.1 | length 6
  [L1] Top w0.32: Digital.3@15.876,59.858 21.841,59.858 F8.1@21.873,59.826
NetF8_2: F8.2 Q8.5 | length 3.8
  [L1] Top w0.32: F8.2@24.843,59.826 28.305,59.826 Q8.5@28.549,59.582
NetF9_1: F9.1 R43.1 R46.2 | length 8.2
  [L1] Top w0.25: R46.2@132.212,105.391 135.098,105.391 135.819,104.67 F9.1@135.819,103.867 135.819,103.052 137.2,101.671 137.2,100.981 R43.1@137.165,100.946
NetF9_2: DSDADC.4 F9.2 | length 11.9
  [L1] Top w0.25: F9.2@138.789,103.867 140.987,103.867 DSDADC.4@147.845,97.009
NetF10_1: F10.1 R44.1 R47.2 | length 7.5
  [L1] Top w0.25: R47.2@132.212,80.245 132.466,79.991 F10.1@135.907,79.991 135.907,79.176 137.2,77.883 137.2,76.851 R44.1@137.165,76.816
NetF10_2: F10.2 P8.6 | length 10.3
  [L1] Top w0.25: F10.2@138.877,79.991 144.543,79.991 P8.6@147.845,76.689
NetF11_1: F11.1 R45.1 R48.2 | length 7.3
  [L1] Top w0.25: R48.2@132.35,49 132.397,48.953 F11.1@136.019,48.953 136.019,48.138 137.3,46.857 137.3,45.97 R45.1@137.365,45.905
NetF11_2: F11.2 P8.1 | length 9.8
  [L1] Top w0.26: F11.2@138.989,48.953 145.382,48.953 147.718,51.289 P8.1@147.845,51.289
NetF12_1: F12.1 R49.1 R52.2 | length 8.1
  [L1] Top w0.25: R52.2@132.224,99.295 134.905,99.295 135.2,99 135.444,99 135.907,98.537 F12.1@135.907,98.025 135.907,97.21 137.2,95.917 137.2,95.012 R49.1@137.165,94.977
NetF12_2: DSDADC.3 F12.2 | length 11.5
  [L1] Top w0.25: F12.2@138.877,98.025 141.749,98.025 DSDADC.3@147.845,91.929
NetF13_1: F13.1 R50.1 R53.2 | length 7.3
  [L1] Top w0.25: R53.2@132.224,74.149 135.051,74.149 135.2,74 135.675,74 F13.1@135.907,73.768 135.907,72.953 137.3,71.56 137.3,70.867 R50.1@137.28,70.847
NetF13_2: F13.2 P8.5 | length 9.9
  [L1] Top w0.25: F13.2@138.877,73.768 145.686,73.768 P8.5@147.845,71.609
NetF14_1: F14.1 R51.1 R54.2 | length 7.5
  [L1] Top w0.25: R54.2@132.35,55.3 132.534,55.484 F14.1@135.958,55.484 135.958,54.669 137.2,53.427 137.2,53 137.25,52.95 R51.1@137.25,52.2
NetF14_2: F14.2 P8.2 | length 9.5
  [L1] Top w0.26: F14.2@138.928,55.484 138.928,55.91 139.387,56.369 P8.2@147.845,56.369
NetF15_1: F15.1 R55.1 R57.2 | length 7.9
  [L1] Top w0.25: R57.2@132.224,92.818 135.444,92.818 135.907,92.355 F15.1@135.907,91.929 135.907,91.114 137.2,89.821 137.2,88.916 R55.1@137.165,88.881
NetF15_2: DSDADC.2 F15.2 | length 11.1
  [L1] Top w0.25: F15.2@138.877,91.929 138.906,91.9 142.3,91.9 147.351,86.849 DSDADC.2@147.845,86.849
NetF16_1: F16.1 R56.1 R58.2 | length 7.3
  [L1] Top w0.25: R58.2@132.212,67.926 132.339,67.799 F16.1@135.907,67.799 135.907,66.984 136.991,65.9 137.054,65.9 137.2,65.754 137.2,64.925 R56.1@137.153,64.878
NetF16_2: F16.2 P8.4 | length 9.5
  [L1] Top w0.25: F16.2@138.877,67.799 146.575,67.799 P8.4@147.845,66.529
NetF17_1: F17.1 R59.1 R61.2 | length 7.6
  [L1] Top w0.25: R61.2@132.212,86.595 135.444,86.595 135.907,86.132 F17.1@135.907,85.833 135.907,85.018 137.1,83.825 137.1,82.977 R59.1@137.165,82.912
NetF17_2: DSDADC.1 F17.2 | length 10.7
  [L1] Top w0.25: F17.2@138.877,85.833 143.654,85.833 147.718,81.769 DSDADC.1@147.845,81.769
NetF18_1: F18.1 R60.1 R62.2 | length 7.2
  [L1] Top w0.25: R62.2@132.339,61.83 F18.1@135.819,61.83 135.819,61.027 136.282,60.564 136.336,60.564 137.026,59.874 R60.1@137.026,58.655
NetF18_2: F18.2 P8.3 | length 9.2
  [L1] Top w0.25: F18.2@138.789,61.83 139.17,61.449 P8.3@147.845,61.449
NetF19_1: F19.1 R83.1 R86.2 | length 6.2
  [L1] Top w0.32: F19.1@146.36,22.439 149.635,22.439 R86.2@149.662,22.466 R83.1@149.662,25.399
NetF19_2: F19.2 P2.6 | length 8.7
  [L1] Top w0.32: P2.6@146.36,10.8 F19.2@146.36,19.469
NetF20_1: F20.1 R84.1 R87.2 | length 6.3
  [L1] Top w0.32: F20.1@120.96,22.385 124.112,22.385 R87.2@124.2,22.473 R84.1@124.2,25.45
NetF20_2: F20.2 P2.2 | length 10.7
  [L1] Top w0.32: F20.2@120.96,19.415 120.96,15.88 P2.2@126.04,10.8
NetF21_1: F21.1 R85.1 R88.2 | length 5.9
  [L1] Top w0.32: F21.1@95.296,22.358 R88.2@98.217,22.358 R85.1@98.217,25.303
NetF21_2: F21.2 SDADC.4 | length 14
  [L1] Top w0.32: F21.2@95.296,19.388 97.132,19.388 SDADC.4@105.72,10.8
NetF22_1: F22.1 R89.1 R92.2 | length 6.2
  [L1] Top w0.32: F22.1@140.029,22.439 143.304,22.439 R92.2@143.331,22.466 R89.1@143.331,25.399